# EAGLE board Schematic_Board_Agriculture_Ubidot (EAGLE 7.1.0)
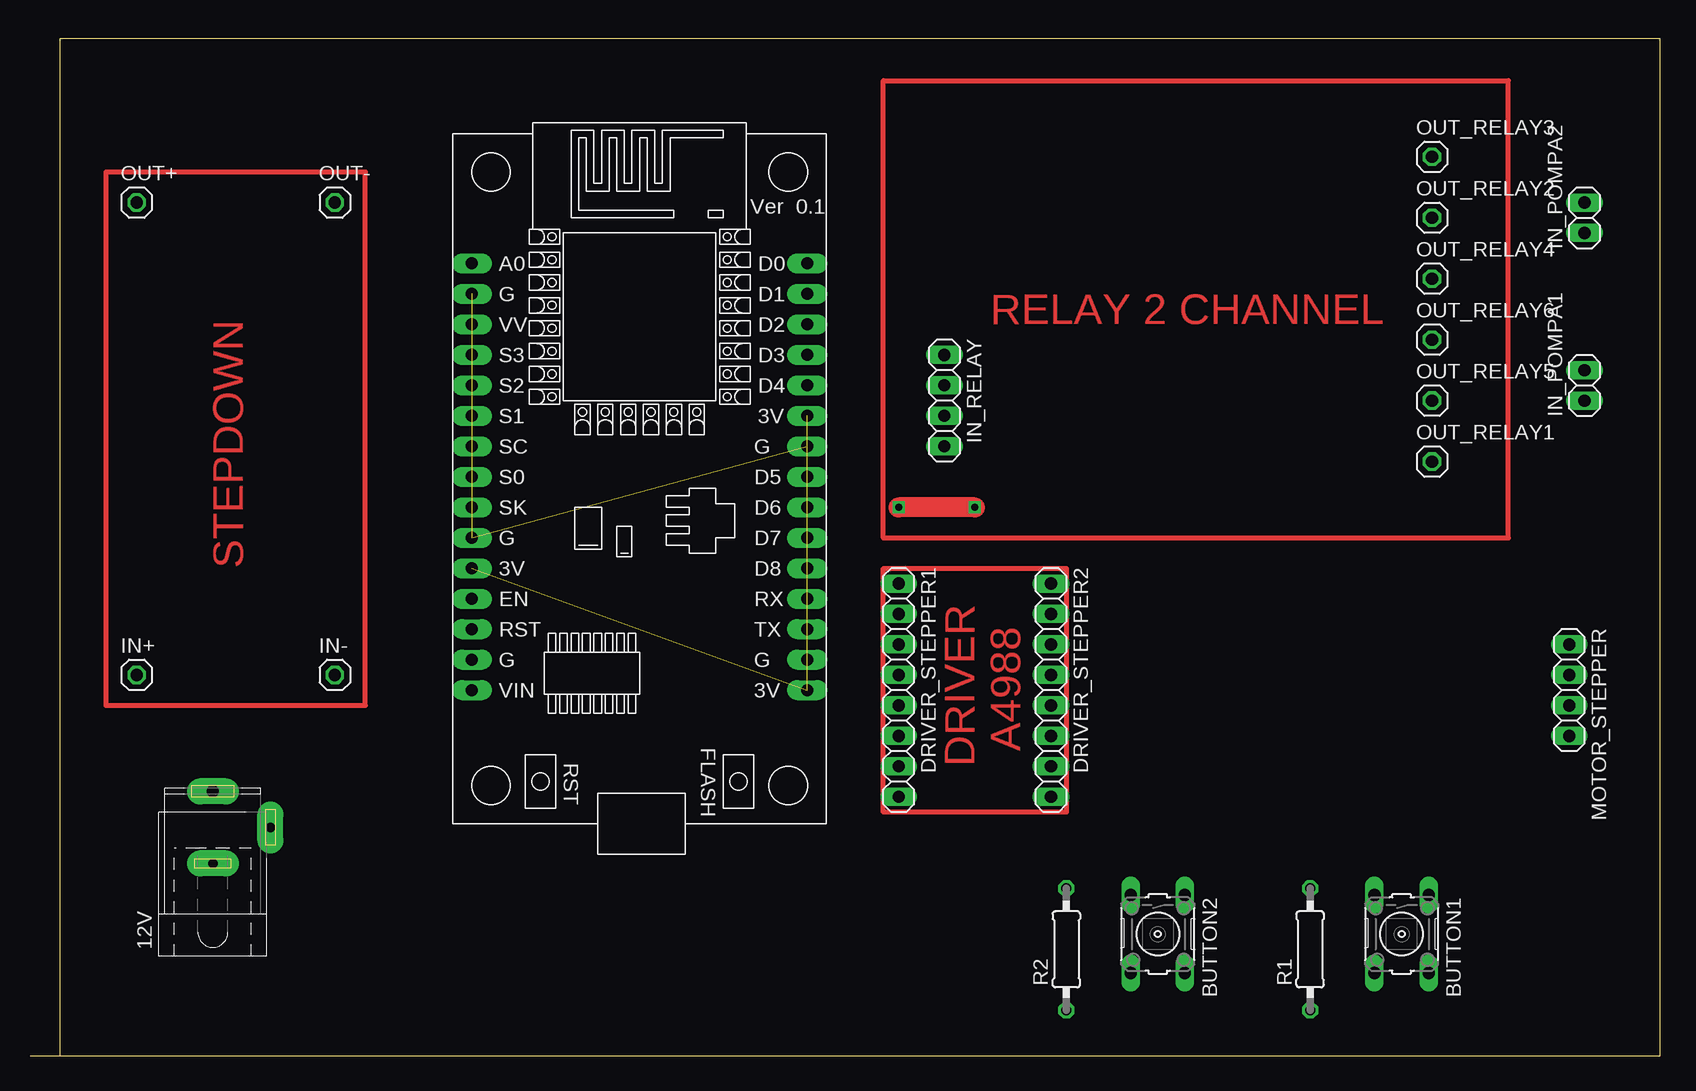
[diagram p0: board, top side]
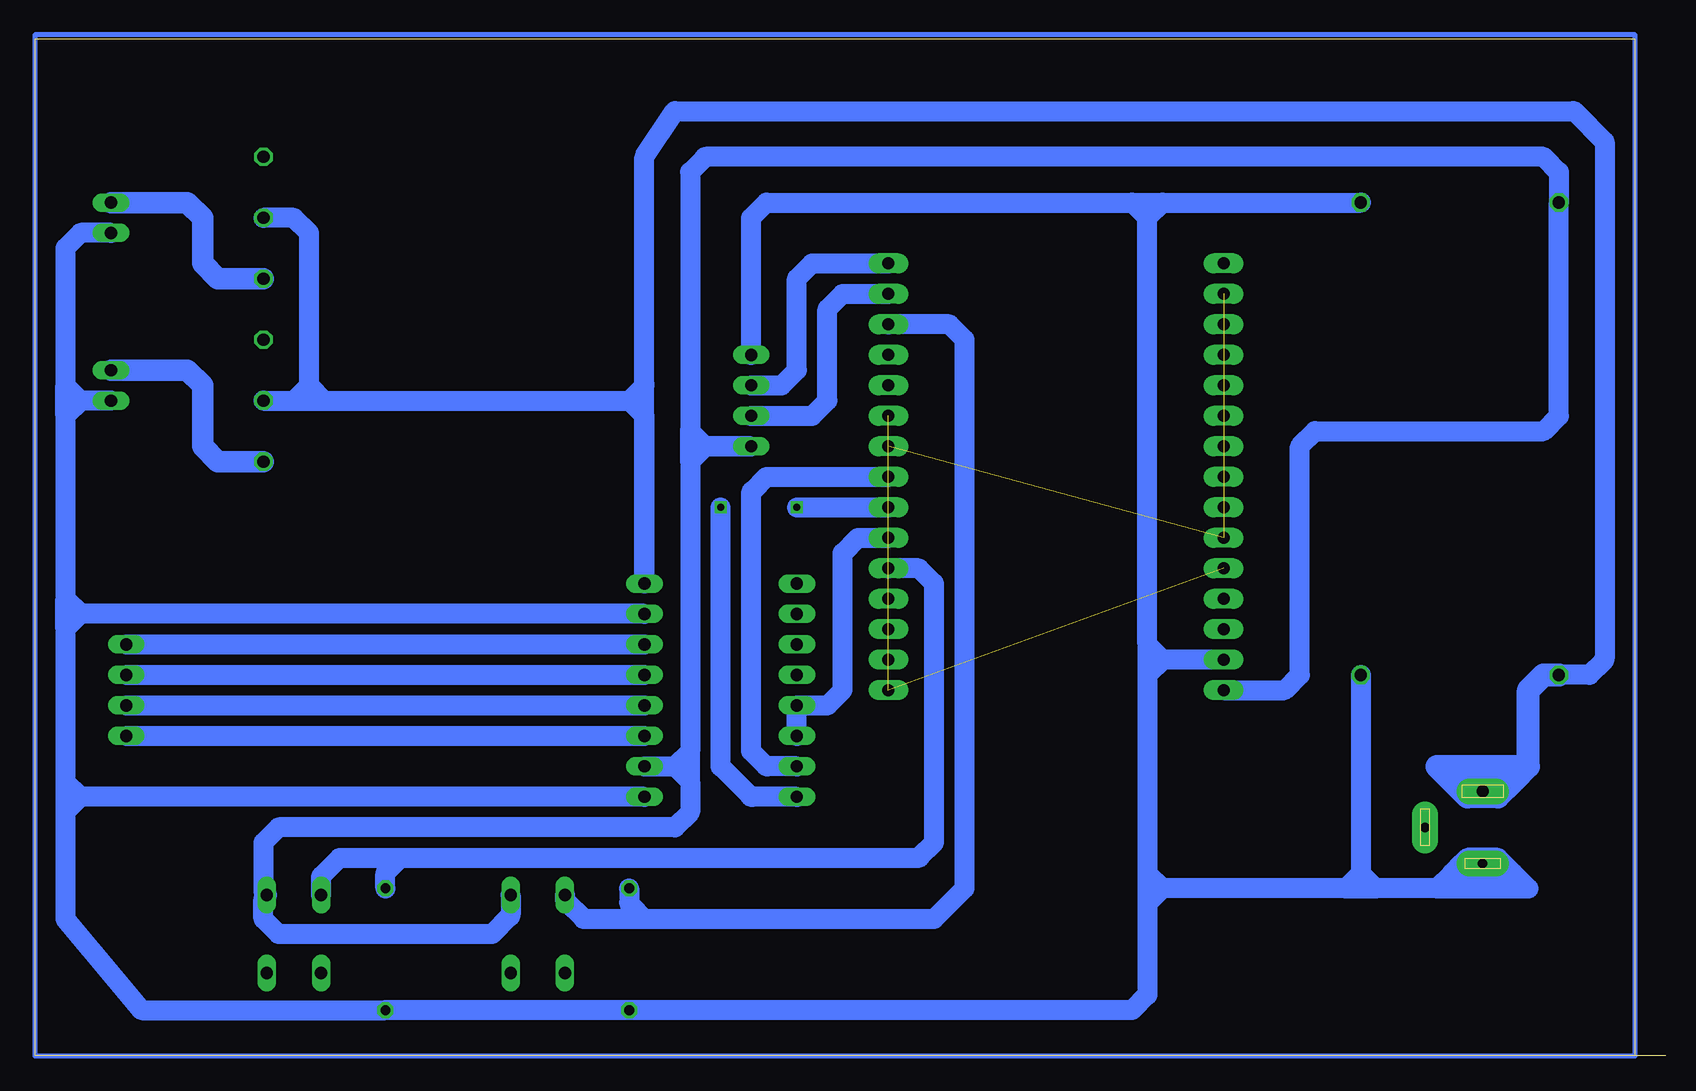
[diagram p1: board, bottom side, seen from below]

Size 135.87 x 84.76 mm. Coordinates in mm from the lower left corner, seen from the top.
Outline: 0,0 2.52,0
Outline: 2.52,0 135.87,0 135.87,84.76 2.54,84.76 2.52,83.49 2.52,0
Copper layers (1*16): Top 0.035mm / dielectric 1.5mm / Bottom 0.035mm
Design rules "default": minimum track width 10mil, minimum drill 24mil, track to track 8mil, track to pad 8mil, pad to pad 8mil, via to via 8mil, smd to smd 8mil, copper to edge 40mil, drill to drill 8mil, minimum pad ring 10mil, minimum via ring 8mil, stop-mask expansion 4mil, vias tented up to drill 0mil, thermal gap 10mil

## Footprints (pad centres in the part's own frame; a part is rotated, then mirrored left to right if it is on the bottom)
SPC4078 = drill 0.8 pad 2.184 long: 1 -3,0; 2 0,-4.8 | drill 1 pad 2.184 long: 3 3,0
B3F-10XX = drill 1.016 long: 1 -3.251,2.261; 2 3.251,2.261; 3 -3.251,-2.261; 4 3.251,-2.261
1X08 = drill 1.016 long: 1 -8.89,0; 2 -6.35,0; 3 -3.81,0; 4 -1.27,0; 5 1.27,0; 6 3.81,0; 7 6.35,0; 8 8.89,0
1X01 = drill 1.016 octagon: 1 0,0
1X02 = drill 1.016 long: 1 -1.27,0; 2 1.27,0
1X04 = drill 1.016 long: 1 -3.81,0; 2 -1.27,0; 3 1.27,0; 4 3.81,0
0207/10 = drill 0.813 octagon: 1 -5.08,0; 2 5.08,0
NODEMCU = drill 1 pad 1.676 long: 1 -13.97,17.78; 2 -13.97,15.24; 3 -13.97,12.7; 4 -13.97,10.16; 5 -13.97,7.62; 6 -13.97,5.08; 7 -13.97,2.54; 8 -13.97,0; 9 -13.97,-2.54; 10 -13.97,-5.08; 11 -13.97,-7.62; 12 -13.97,-10.16; 13 -13.97,-12.7; 14 -13.97,-15.24; 15 -13.97,-17.78; 16 13.97,-17.78; 17 13.97,-15.24; 18 13.97,-12.7; 19 13.97,-10.16; 20 13.97,-7.62; 21 13.97,-5.08; 22 13.97,-2.54; 23 13.97,0; 24 13.97,2.54; 25 13.97,5.08; 26 13.97,7.62; 27 13.97,10.16; 28 13.97,12.7; 29 13.97,15.24; 30 13.97,17.78

## Placement (x,y rotation side)
12V  [SPC4078]  15.24,19.05 90 top
BUTTON1  [B3F-10XX]  114.3,10.16 270 top
BUTTON2  [B3F-10XX]  93.98,10.16 270 top
DRIVER_STEPPER1  [1X08]  72.39,30.48 270 top
DRIVER_STEPPER2  [1X08]  85.09,30.48 270 top
IN+  [1X01]  8.89,31.75 0 top
IN-  [1X01]  25.4,31.75 0 top
IN_POMPA1  [1X02]  129.54,55.88 90 top
IN_POMPA2  [1X02]  129.54,69.85 90 top
IN_RELAY  [1X04]  76.2,54.61 270 top
MOTOR_STEPPER  [1X04]  128.27,30.48 270 top
OUT+  [1X01]  8.89,71.12 0 top
OUT-  [1X01]  25.4,71.12 0 top
OUT_RELAY1  [1X01]  116.84,49.53 0 top
OUT_RELAY2  [1X01]  116.84,69.85 0 top
OUT_RELAY3  [1X01]  116.84,74.93 0 top
OUT_RELAY4  [1X01]  116.84,64.77 0 top
OUT_RELAY5  [1X01]  116.84,54.61 0 top
OUT_RELAY6  [1X01]  116.84,59.69 0 top
R1  [0207/10]  106.68,8.89 90 top
R2  [0207/10]  86.36,8.89 90 top
U$1  NODEMCU  [NODEMCU]  50.8,48.26 0 top

## Library data of the parts
12V = con-jack; OC_FARNELL: unknown; OC_NEWARK: unknown
BUTTON1 BUTTON2 = switch-omron; MPN: B3F-1000; OC_FARNELL: 176432; OC_NEWARK: 36M3542
DRIVER_STEPPER1 DRIVER_STEPPER2 IN+ IN- IN_POMPA1 IN_POMPA2 IN_RELAY MOTOR_STEPPER OUT+ OUT- OUT_RELAY1-OUT_RELAY6 = pinhead
R1 R2 = eagle-ltspice; SPICEMODEL: NONE; SPICEPREFIX: R
U$1 = nodemcu

## Nets
3V: U$1.11 U$1.16 U$1.25
GND: U$1.2 U$1.10 U$1.17 U$1.24
N$1: DRIVER_STEPPER2.3 MOTOR_STEPPER.1
N$2: DRIVER_STEPPER2.4 MOTOR_STEPPER.2
N$3: DRIVER_STEPPER2.5 MOTOR_STEPPER.3
N$4: DRIVER_STEPPER2.6 MOTOR_STEPPER.4
N$5: IN_POMPA2.2 OUT_RELAY4.1
N$6: 12V.1 DRIVER_STEPPER2.2 DRIVER_STEPPER2.8 IN-.1 IN_POMPA1.1 IN_POMPA2.1 IN_RELAY.1 OUT-.1 R1.1 R2.1 U$1.14
N$7: DRIVER_STEPPER1.5 DRIVER_STEPPER1.6 U$1.21
N$10: DRIVER_STEPPER1.8 U$1.22
N$11: DRIVER_STEPPER1.7 U$1.23
N$12: IN_RELAY.2 U$1.30
N$13: IN_RELAY.3 U$1.29
N$14: BUTTON1.3 R1.2 U$1.20
N$15: BUTTON2.3 R2.2 U$1.28
N$16: IN_POMPA1.2 OUT_RELAY1.1
N$18: BUTTON1.1 BUTTON2.1 DRIVER_STEPPER2.7 IN_RELAY.4 OUT+.1 U$1.15
N$19: 12V.3 DRIVER_STEPPER2.1 IN+.1 OUT_RELAY2.1 OUT_RELAY5.1

## Tracks (layer width: path | path; a pad name or v marks a point on that pad's centre or on a via)
3V  (2 unrouted)
GND  (3 unrouted)
N$1
  Bottom 1.676: MOTOR_STEPPER.1 DRIVER_STEPPER2.3
N$2
  Bottom 1.676: MOTOR_STEPPER.2 DRIVER_STEPPER2.4
N$3
  Bottom 1.676: MOTOR_STEPPER.3 DRIVER_STEPPER2.5
N$4
  Bottom 1.676: MOTOR_STEPPER.4 DRIVER_STEPPER2.6
N$5
  Bottom 1.778: OUT_RELAY4.1 120.65,64.77 121.92,66.04 121.92,69.85 123.19,71.12 IN_POMPA2.2
N$6
  Bottom 1.676: 12V.1 16.97,16.05 | 16.97,16.05 17.78,15.24 | 12.7,15.24 13.97,16.51 16.51,16.51 16.97,16.05 | 19.05,13.97 11.43,13.97 12.7,15.24 | 12.7,15.24 17.78,15.24 | 17.78,15.24 19.05,13.97 | 19.05,13.97 24.13,13.97 | 24.13,13.97 25.4,15.24 | U$1.14 41.91,33.02 | 41.91,33.02 43.18,34.29 | 43.18,34.29 43.18,69.85 | IN_POMPA2.1 132.08,68.58 133.35,67.31 133.35,55.88 | 133.35,55.88 132.08,54.61 | IN_POMPA1.1 132.08,54.61 | 132.08,54.61 133.35,53.34 | 133.35,53.34 133.35,55.88 | 133.35,53.34 133.35,38.1 | 133.35,38.1 132.08,36.83 | DRIVER_STEPPER2.2 132.08,36.83 | 132.08,36.83 133.35,35.56 | 133.35,35.56 133.35,38.1 | 133.35,35.56 133.35,22.86 | 133.35,21.59 133.35,20.32 | 133.35,20.32 133.35,11.43 127,3.81 R1.1 R2.1 44.45,3.81 43.18,5.08 43.18,12.7 | IN_RELAY.1 76.2,69.85 74.93,71.12 44.45,71.12 | 44.45,71.12 43.18,69.85 | 43.18,34.29 43.18,31.75 | 41.91,33.02 43.18,31.75 | 43.18,31.75 43.18,15.24 | 43.18,13.97 43.18,12.7 | DRIVER_STEPPER2.8 132.08,21.59 | 133.35,21.59 132.08,21.59 | 132.08,21.59 133.35,22.86 | 133.35,22.86 133.35,21.59 | 133.35,20.32 132.08,21.59 | 43.18,69.85 41.91,71.12 | 44.45,71.12 41.91,71.12 | 41.91,71.12 OUT-.1 | IN-.1 25.4,15.24 | 25.4,15.24 26.67,13.97 | 26.67,13.97 24.13,13.97 | 26.67,13.97 41.91,13.97 | 43.18,13.97 41.91,13.97 | 41.91,13.97 43.18,15.24 | 43.18,15.24 43.18,13.97 | 43.18,12.7 41.91,13.97
N$7
  Bottom 1.676: DRIVER_STEPPER1.6 DRIVER_STEPPER1.5 69.95,29.21 arc-45 69.78,29.28 68.58,30.48 68.58,41.91 67.31,43.18 U$1.21
N$8
  Bottom 0.406: 2.54,85.09 135.89,85.09 135.89,0 2.54,0 2.54,85.09
N$10  (via drill 0.6)
  Top 1.676: v78.74,45.72 v72.39,45.72
  Bottom 1.676: DRIVER_STEPPER1.8 76.09,21.59 arc45 76.27,21.66 78.74,24.13 v78.74,45.72 | v72.39,45.72 U$1.22
N$11
  Bottom 1.676: DRIVER_STEPPER1.7 74.83,24.13 arc45 75,24.2 76.2,25.4 76.2,46.88 arc45 76.13,47.06 74.93,48.26 U$1.23
N$12
  Bottom 1.676: IN_RELAY.2 73.66,55.88 72.39,57.15 72.39,64.77 71.12,66.04 U$1.30
N$13
  Bottom 1.676: IN_RELAY.3 71.12,53.34 69.85,54.61 69.85,62.23 68.58,63.5 U$1.29
N$14
  Bottom 1.676: BUTTON1.3 112.04,14.86 arc45 111.97,15.04 110.49,16.51 105.41,16.51 | U$1.20 62.23,40.64 61.03,39.44 arc45 60.96,39.27 60.96,17.78 62.16,16.58 arc45 62.34,16.51 105.41,16.51 | R1.2 106.68,15.13 arc45 106.61,15.31 105.41,16.51
N$15
  Bottom 1.676: U$1.28 59.69,60.96 58.42,59.69 58.42,13.97 60.96,11.43 85.09,11.43 | BUTTON2.3 91.72,13.09 arc-45 91.64,12.9 90.17,11.43 85.09,11.43 | R2.2 86.36,12.8 arc-45 86.29,12.63 85.09,11.43
N$16
  Bottom 1.778: OUT_RELAY1.1 120.65,49.53 121.92,50.8 121.92,55.88 123.19,57.15 IN_POMPA1.2
N$17
  Top 0.406: 71.12,43.18 123.19,43.18 123.19,81.28 71.12,81.28 71.12,43.18
N$18
  Bottom 1.676: 81.28,49.53 80.08,50.73 arc45 79.91,50.8 IN_RELAY.4 80.01,50.8 81.21,52 arc45 81.28,52.17 81.28,73.66 80.08,74.86 arc45 79.91,74.93 10.16,74.93 8.89,73.66 OUT+.1 8.89,53.34 10.16,52.07 29.21,52.07 30.48,50.8 30.48,31.75 31.75,30.48 U$1.15 | 81.28,49.53 81.28,52.07 | 81.28,49.53 81.28,25.4 | 81.28,25.4 82.55,24.13 | DRIVER_STEPPER2.7 82.55,24.13 | 82.55,24.13 81.28,22.86 | 81.28,22.86 81.28,25.4 | 81.28,22.86 81.28,20.32 82.55,19.05 115.57,19.05 116.84,17.78 116.84,13.8 arc-45 116.77,13.62 BUTTON1.1 116.77,13.21 arc-45 116.84,13.03 116.84,11.43 115.57,10.16 97.79,10.16 96.31,11.63 arc-45 96.24,11.81 BUTTON2.1
N$19
  Bottom 1.676: 113.03,55.88 114.3,54.61 OUT_RELAY5.1 111.76,54.61 | 113.03,55.88 113.03,68.58 114.3,69.85 OUT_RELAY2.1 | 113.03,55.88 111.76,54.61 | 111.76,54.61 86.36,54.61 | 86.36,54.61 85.09,53.34 DRIVER_STEPPER2.1 85.09,55.88 | 85.09,55.88 85.09,55.98 | 85.09,55.98 arc45 85.16,55.81 | 85.16,55.81 86.36,54.61 | 85.16,55.81 85.09,55.88 | 85.09,55.98 85.09,74.93 82.55,78.74 7.72,78.74 arc45 7.55,78.67 5.08,76.2 5.08,33.12 arc45 5.15,32.95 6.35,31.75 IN+.1
  Bottom 1.93: 12V.3 16.86,22.05 arc45 17.04,22.12 17.78,22.86 12.7,22.86 | 11.43,24.13 19.05,24.13 16.51,21.59 13.97,21.59 12.7,22.86 | 11.43,24.13 12.7,22.86 | 11.43,24.13 11.43,30.48 10.16,31.75 IN+.1
N$20
  Top 0.406: 71.12,40.64 86.36,40.64 86.36,20.32 71.12,20.32 71.12,40.64
N$22
  Top 0.406: 6.35,29.21 27.94,29.21 27.94,73.66 6.35,73.66 6.35,29.21

## Text on the board
Top: RELAY 2 CHANNEL | STEPDOWN | A4988 | DRIVER